# Altium PCB CTR-Upper-Main-Board-Rev-B.PcbDoc
Units mil, origin at the board's own origin, x right, y up, seen from the top; angles counter-clockwise.
Board outline 1558.99 x 1570.6 mil, 2 copper layers (Top Layer, Bottom Layer), stack 61.2 mil thick; 19 components, 8 nets, 46 pads, 15 vias.
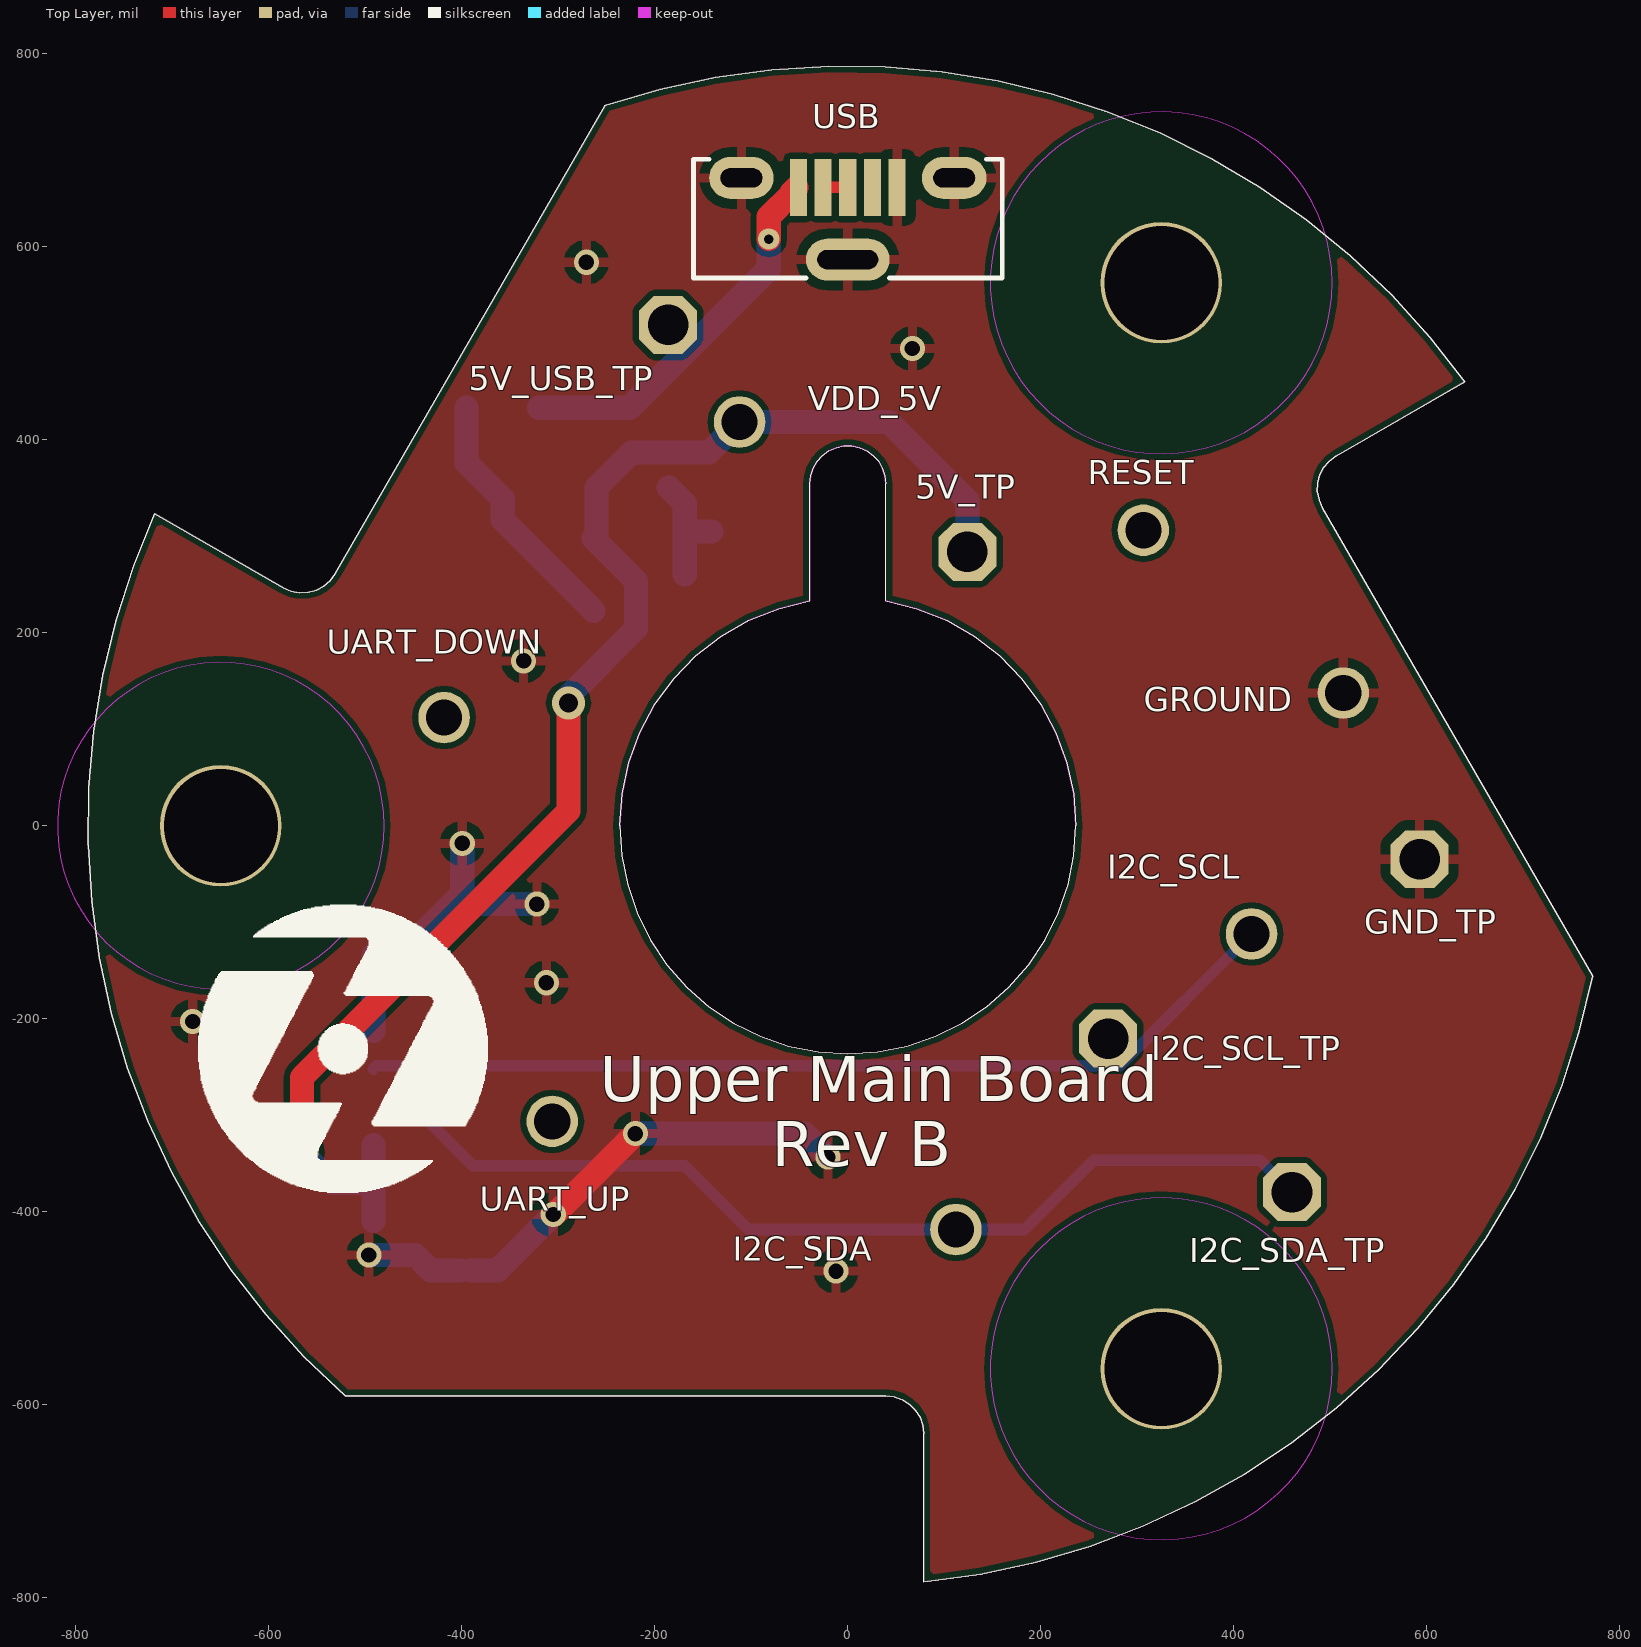
[diagram p0: Top Layer view]
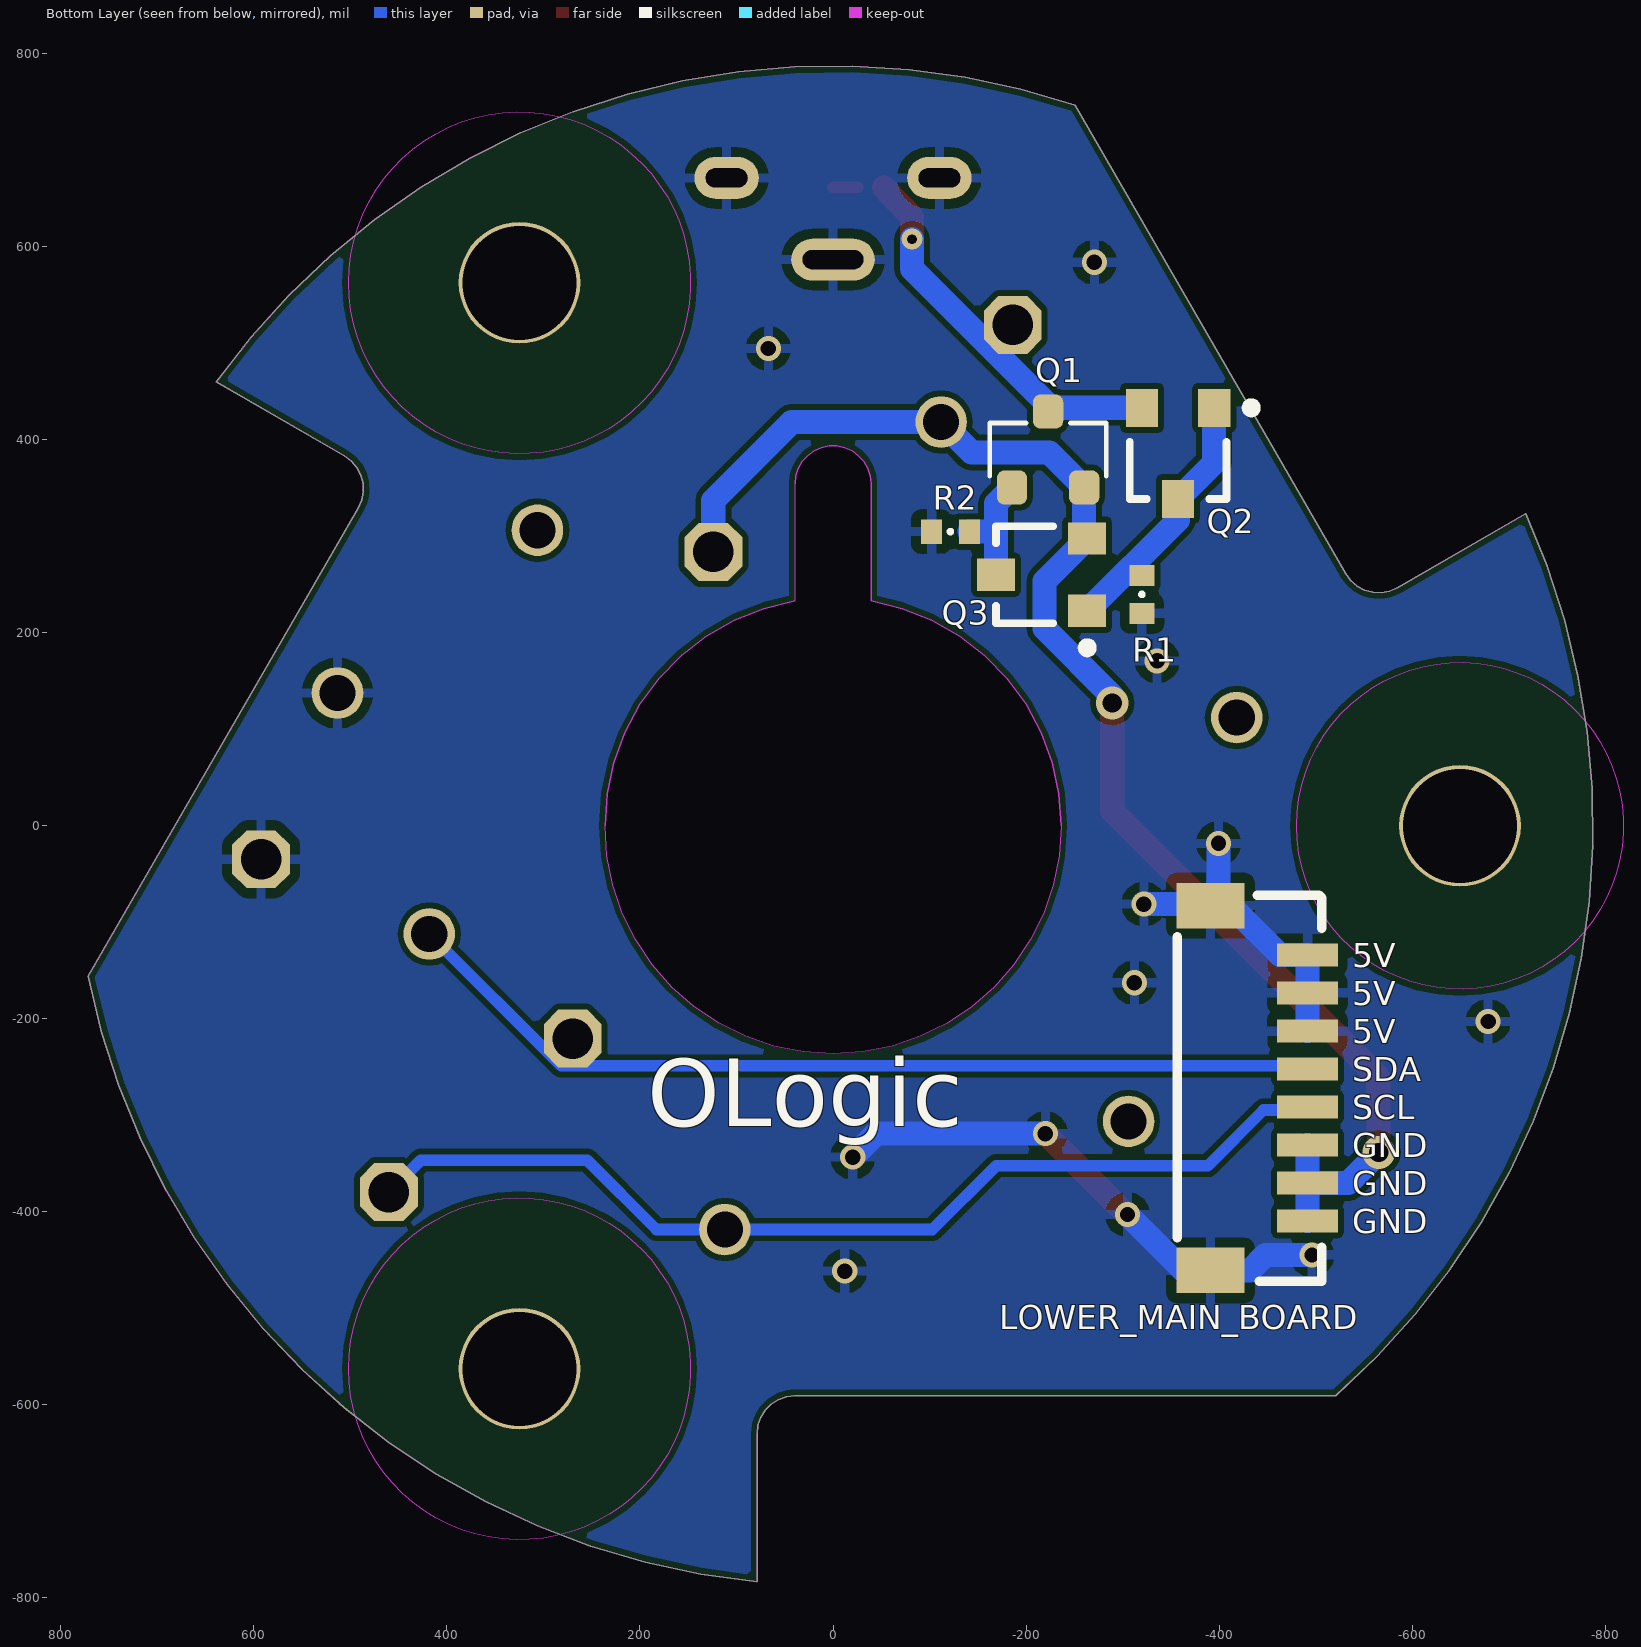
[diagram p1: Bottom Layer view, seen from below]
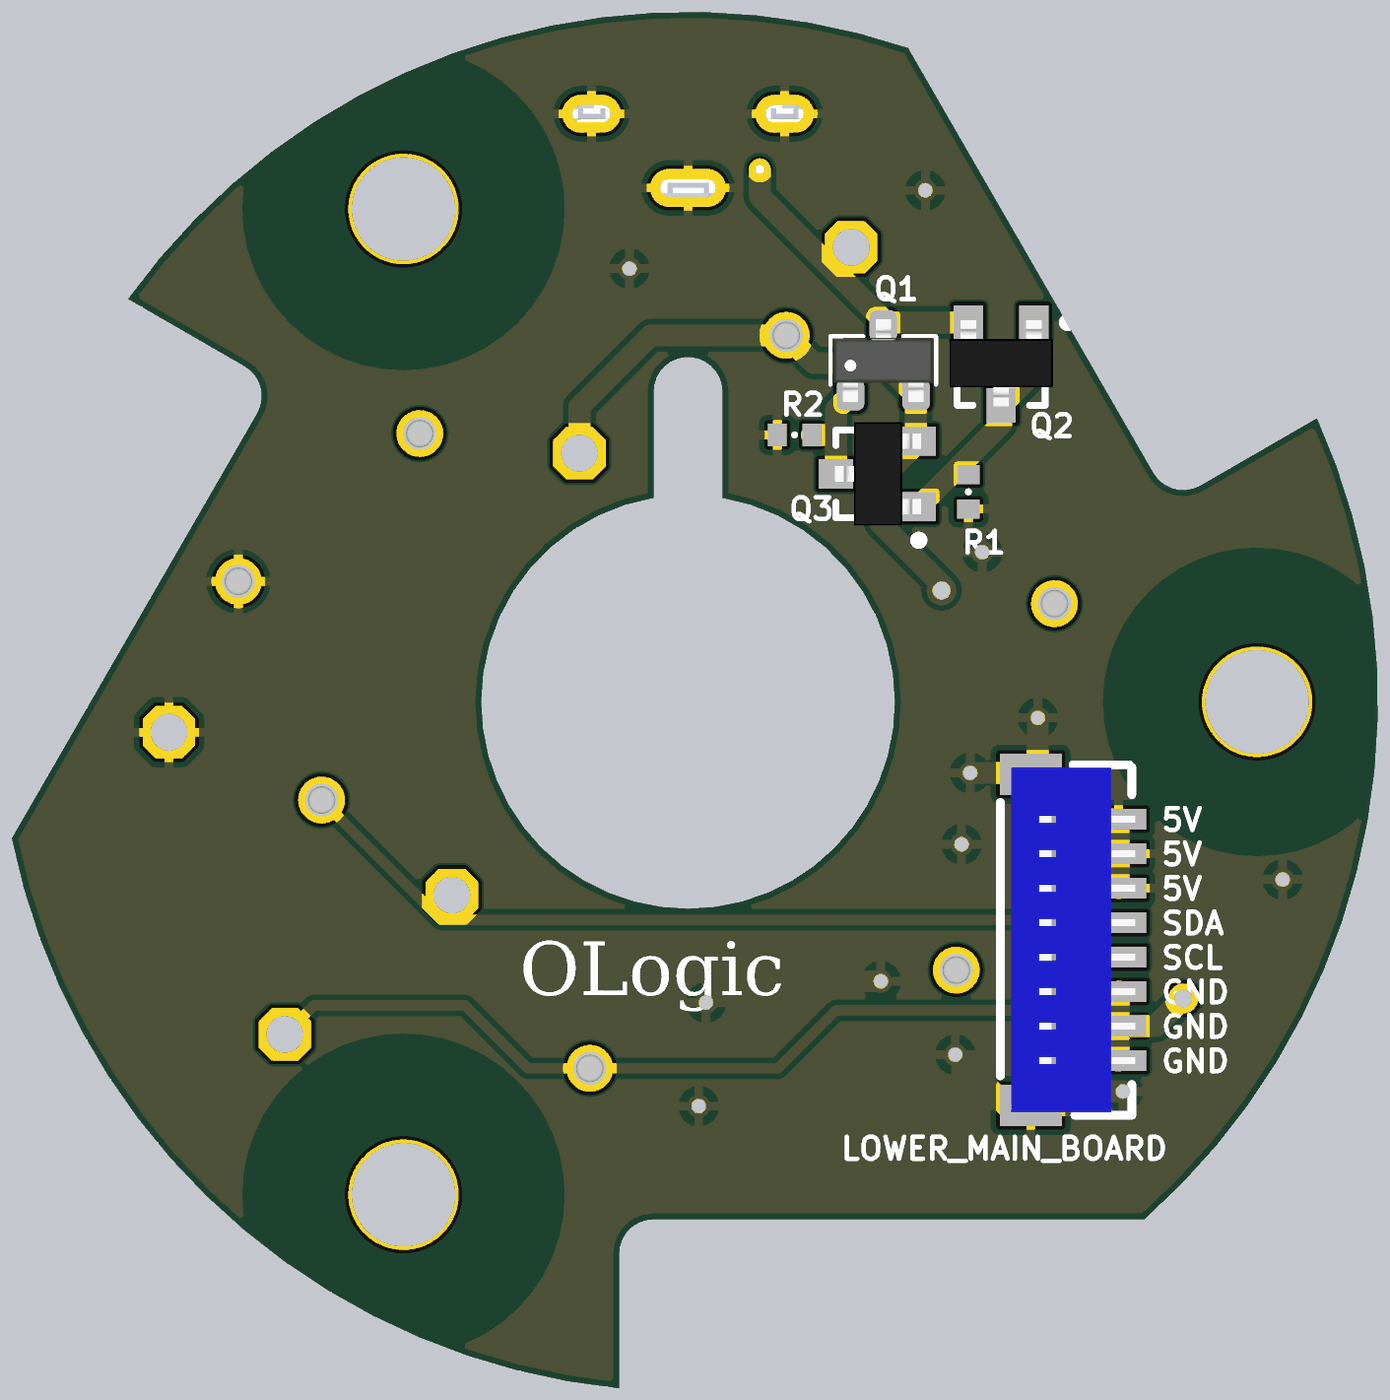
[diagram p2: 3D render of the assembled board from below, using the file's embedded part models]

## Layer stack, top to bottom
Top Solder: solder mask 0.4, Solder Resist, Dk 3.5
Top Layer: signal copper 1.8
Dielectric1: core 57.6, Dk 4.2
Bottom Layer: signal copper 1.8
Bottom Solder: solder mask 0.4, Solder Resist, Dk 3.5

## Board outline
-531.12,261.18 -251.02,746.32 -194.55,762.99 -137,775.39 -78.67,783.46 -19.91,787.15 38.96,786.44 97.62,781.33 155.73,771.85 212.97,758.05 269.02,740.02 323.57,717.85 376.3,691.66 426.93,661.61 475.18,627.86 520.77,590.6 563.44,550.03 602.97,506.39 639.12,459.92 506.16,383.15 499.06,377.92 493.31,371.23 489.19,363.44 486.91,354.92 486.58,346.11 488.22,337.45 491.75,329.37 771.84,-155.76 758.04,-213 740.01,-269.05 717.83,-323.6 691.65,-376.33 661.59,-426.96 627.84,-475.21 590.57,-520.79 550.01,-563.47 506.36,-602.99 459.89,-639.14 410.85,-671.72 359.5,-700.54 306.15,-725.45 251.09,-746.29 194.62,-762.97 137.06,-775.38 78.74,-783.45 78.74,-629.92 77.75,-621.16 74.84,-612.84 70.15,-605.37 63.92,-599.14 56.45,-594.45 48.13,-591.54 39.37,-590.55 -520.82,-590.55 -563.49,-549.98 -603.01,-506.34 -639.16,-459.86 -671.74,-410.82 -700.56,-359.47 -725.46,-306.12 -746.31,-251.06 -762.98,-194.59 -775.39,-137.03 -783.46,-78.71 -787.15,-19.94 -786.44,38.93 -781.33,97.59 -771.85,155.7 -758.06,212.94 -740.03,268.99 -717.86,323.54 -584.9,246.77 -576.82,243.24 -568.16,241.61 -559.35,241.94 -550.83,244.22 -543.03,248.34 -536.35,254.09
cut-out: -39.37,354.33 -39.37,232.92 -71.56,225.12 -102.35,212.9 -131.12,196.49 -157.31,176.22 -180.42,152.48 -199.97,125.75 -215.59,96.54 -226.98,65.43 -233.9,33.04 -236.22,0 -234.2,-30.83 -228.17,-61.14 -218.24,-90.4 -204.57,-118.11 -187.41,-143.8 -167.03,-167.03 -143.8,-187.41 -118.11,-204.57 -90.4,-218.24 -61.14,-228.17 -30.83,-234.2 0,-236.22 30.83,-234.2 61.14,-228.17 90.4,-218.24 118.11,-204.57 143.8,-187.41 167.03,-167.03 187.41,-143.8 204.57,-118.11 218.24,-90.4 228.17,-61.14 234.2,-30.83 236.22,0 233.9,33.04 226.98,65.43 215.59,96.54 199.97,125.75 180.42,152.48 157.31,176.22 131.12,196.49 102.35,212.9 71.56,225.12 39.37,232.92 39.37,354.33 38.51,362.52 35.97,370.34 31.85,377.47 26.34,383.59 19.68,388.43 12.17,391.77 4.12,393.49 -4.12,393.49 -12.17,391.77 -19.68,388.43 -26.34,383.59 -31.85,377.47 -35.97,370.34 -38.51,362.52

## Design rules (kind name [scope] priority, off if disabled: settings)
Clearance [All] p1: gap=6 ignorepadtopadclearanceinfootprint=FALSE except(0: Arc-Hole Track-Hole SMDPad-Hole THPad-Hole Via-Hole Fill-Hole Poly-Hole Region-Hole Text-Hole)
ComponentClearance ComponentClearance_BAT [InComponent('BT1') vs InComponent('CN3')] p1: gap=0 collisioncheckmode=3 verticalgap=0 showdistances=FALSE
ComponentClearance [All] p2: gap=7 collisioncheckmode=3 verticalgap=7 showdistances=FALSE
HoleSize [All] p1: absolutevalues=TRUE maxlimit=300 minlimit=10 maxpercent=80.000 minpercent=20.000
HoleToHoleClearance [All] p1: gap=7 allowstackedmicrovias=TRUE
MinimumSolderMaskSliver [InNet('VIN')] p1: minsoldermaskwidth=0.5
NetAntennae NetAntennae_ANT [InNetClass('ANT')] p1: netantennaetolerance=0
NetAntennae [All] p2: netantennaetolerance=0
PolygonConnect [All] p1: connectstyle=Relief reliefconductorwidth=10 reliefentries=4 polygonreliefangle="90 Angle" airgapwidth=10
RoutingVias [All] p1: holewidth=20 width=34 viastyle="Through Hole" minholewidth=10 minwidth=22 maxholewidth=35 maxwidth=50
SMDNeckDown [All] p1: percent=900.000
SilkToBoardRegionClearance [InNet('3.3V')] p1:
SilkToSilkClearance [All] p1: silktosilkclearance=0
SilkToSolderMaskClearance [IsPad] p1: minsilkscreentomaskgap=0 clearancetoexposedcopper=TRUE
SolderMaskExpansion [All] p1: expansion=4
Width Width_BT [InNetClass('BT')] p1: maxlimit=40 minlimit=10 preferedwidth=15
Width Width_VDD [InNet('3.3V')] p2: maxlimit=20 minlimit=7 preferedwidth=10
Width [All] p3: maxlimit=30 minlimit=6 preferedwidth=7
22 further rules are at their usual default settings.

## Classes and differential pairs
component class CTR-Upper-Main-Board-Rev-B: 5V_TP 5V_USB_TP GND_TP GROUND I2C_SCL I2C_SCL_TP I2C_SDA I2C_SDA_TP LOWER_MAIN_BOARD RESET UART_DOWN UART_UP USB VDD_5V
component class ID1: Q1 Q2 Q3 R1 R2

## Components (designator, comment, footprint, x,y, rotation, side; value= is the part's Value field where it differs from the comment)
5V_TP "Test Point" "TestPoint-TH 42 mil" 124.02,283.86 r90 top
5V_USB_TP "Test Point" "TestPoint-TH 42 mil" -186.22,518.9 r90 top
GND_TP "Test Point" "TestPoint-TH 42 mil" 592.52,-34.65 r90 top
GROUND "Pogo Pin Target Large" CTR_POGO_PIN_TARGET_LARGE 513.39,137.56 r90 top
I2C_SCL "Pogo Pin Target Large" CTR_POGO_PIN_TARGET_LARGE 418.31,-112.09 r90 top
I2C_SCL_TP "Test Point" "TestPoint-TH 42 mil" 269.68,-220.47 r90 top
I2C_SDA "Pogo Pin Target Large" CTR_POGO_PIN_TARGET_LARGE 112.09,-418.31 r90 top
I2C_SDA_TP "Test Point" "TestPoint-TH 42 mil" 460.24,-379.53 r90 top
LOWER_MAIN_BOARD "JST 1mm 0.7A" JST-BM08B-SRSS-TB -441.34,-271.65 r270 bottom
Q1 "DMG2305UX" DMG2305UX-7 -222.83,389.76 r180 bottom
Q2 "MMBT2907A" SOT23 -357.48,385.83 r0 bottom
Q3 "MMBT2907A" SOT23 -216.14,260.24 r90 bottom
R1 "47K" RESC0402(1005)_N -320.08,239.76 r90 bottom
R2 "54.9K" RESC0402(1005)_N -121.65,304.72 r180 bottom
RESET "Pogo Pin Target Large" CTR_POGO_PIN_TARGET_LARGE 306.22,306.22 r90 top
UART_DOWN "Pogo Pin Target Large" CTR_POGO_PIN_TARGET_LARGE -418.31,112.09 r90 top
UART_UP "Pogo Pin Target Large" CTR_POGO_PIN_TARGET_LARGE -306.22,-306.22 r90 top
USB "USB-uB-V" MOLEX_105133-0011 0,629.92 r0 top
VDD_5V "Pogo Pin Target Large" CTR_POGO_PIN_TARGET_LARGE -112.09,418.31 r90 top

## Footprints (in the part's own frame and the unit in brackets; to place one, negate y for a bottom-side part, rotate by r counter-clockwise, add the part's x,y. Pads: shape width x height; smd on the part's side, far side on the other; paste and mask are expansions set on the pad)
CTR_POGO_PIN_TARGET_LARGE [mm] "Through-hole pogo pin target, large"
  round 1.356 hole 0.95: 1(0,0)
  body extent -1.1,-1.1 1.11,1.11, height 6.75
DMG2305UX-7 [mm] "SOT95P240X110-3L30 - Small Outline Transistor (SOT23), 0.95 mm pitch; 3 pin, 2.90 mm L X 1.30 mm W X 1.10 mm H body"
  rrect50% 0.8x0.9 smd: D(0,1) G(-0.95,-1) S(0.95,-1)
  silkscreen extent -1.53,-0.7 1.53,0.7, body extent -1.45,-1.2 1.45,1.2, height 1.1
JST-BM08B-SRSS-TB [mm] "JST 1mm x 8 SMT Vertical Connector"
  rect 1.2x1.8 smd: 0(-4.8,-1.275) 0(4.8,-1.275)
  rect 0.6x1.6 smd: 1(-3.5,1.275) 2(-2.5,1.275) 3(-1.5,1.275) 4(-0.5,1.275) 5(0.5,1.275) 6(1.5,1.275) 7(2.5,1.275) 8(3.5,1.275)
  silkscreen extent -5.07,-2.15 5.09,1.66, body extent -5,-1.84 5,1.76, height 4.32
MOLEX_105133-0011 [mm] "Connector, USB Receptacle Right Angle; 8 pin, 8.00 mm L X 3.00 mm W X 6.70 mm H body"
  rrect100% 1.7x1.1 hole 0.5 slot 1.1 at 0 deg paste-1.7: 0(-2.8,1.05) 0(2.8,1.05)
  rrect100% 2.2x1.1 hole 0.5 slot 1.6 at 0 deg paste-2.2: 0(0,-1.1)
  rect 0.45x1.5 smd: 1(-1.3,0.8) 2(-0.65,0.8) 3(0,0.8) 4(0.65,0.8) 5(1.3,0.8)
  silkscreen extent -4.06,-1.58 4.06,1.54, body extent -4.03,-1.58 3.97,1.43, height 6.71
RESC0402(1005)_N [mm] "Chip Resistor, Body 1.0x0.5mm, IPC Medium Density"
  rect 0.55x0.65 smd: 1(-0.5,0) 2(0.5,0)
  silkscreen extent -0.05,-0.05 0.05,0.05, body extent -0.52,-0.27 0.53,0.28, height 0.4
SOT23 [mm] "SOT-23; 3 Leads; Body 3.0 x 2.5 mm, inc. leads (LxW max)"
  rect 0.85x1 smd: 1(-0.95,-1.2) 2(0.95,-1.2) 3(0,1.2)
  silkscreen extent -2.05,-1.32 1.28,1.2, body extent -1.5,-1.27 1.5,1.23, height 1.1
"TestPoint-TH 42 mil" [mil] "Test Point - Thru-Hole 42 mil"
  oct 60x60 hole 42: 1(0,0)

## Part data
5V_TP 5V_USB_TP GND_TP I2C_SCL_TP I2C_SDA_TP: library part "TestPoint, small"
GROUND I2C_SCL I2C_SDA RESET UART_DOWN UART_UP VDD_5V: library part "CTR Pogo Pin Target Large", "CTR Pogo Pin Target Large", Manufacturer 1=CTR, Manufacturer Part Number 1="Large Target", Category="Connectors, Interconnects", Material="Copper Alloy", Mounting Type="Through Hole", Part Status=Active, Plating=Gold, Supplier 1=CTR, Supplier Part Number 1="Large Target", Supplier Stock 1=9999999, Supplier Unit Price 1=0.15
LOWER_MAIN_BOARD: library part JST-BM08B-SRSS-TB(LF)(SN), "1mm Locking Header, 8-Pin", Manufacturer="Japan Solderless Terminals (JST)", Manufacturer Part Number=BM08B-SRSS-TB(LF)(SN), Supplier Part Number 1=455-1794-1-ND, ComponentLink1Description=https://datasheet.ciiva.com/730/esr-730608.pdf, ComponentLink1URL=https://datasheet.ciiva.com/730/esr-730608.pdf, ComponentLink2Description=https://datasheet.ciiva.com/26894/getdatasheetpartid-640965-26894529.pdf, ComponentLink2URL=https://datasheet.ciiva.com/26894/getdatasheetpartid-640965-26894529.pdf, ComponentLink3Description=https://datasheet.ciiva.com/712/esr-712616.pdf, ComponentLink3URL=https://datasheet.ciiva.com/712/esr-712616.pdf, ComponentLink4Description=https://datasheet.ciiva.com/712/esr-712617.pdf, ComponentLink4URL=https://datasheet.ciiva.com/712/esr-712617.pdf, ComponentLink5Description=https://datasheet.ciiva.com/8052/91630-8052091.pdf, ComponentLink5URL=https://datasheet.ciiva.com/8052/91630-8052091.pdf, ComponentLink6Description=https://datasheet.ciiva.com/16380/esr-16380526.pdf, ComponentLink6URL=https://datasheet.ciiva.com/16380/esr-16380526.pdf, No of Positions=8, Pitch="1 mm", Pricing 1="1=0.93, 10=0.814, 100=0.7024, 500=0.5747 (USD)", Stock 1=18919, Style/Orientation="Vertical Header/Plug", Supplier 1=Digikey, Termination=Solder, Type="Shrouded Header"
Q1: "MOSFET P-CH 20V 4.2A SOT23", Current - Continuous Drain (Id) @ 25°C="4.2A (Ta)", Drain to Source Voltage (Vdss)=20V, Input Capacitance (Ciss) @ Vds="808pF @ 15V", Manufacturer="Diodes Incorporated", Manufacturer Part Number=DMG2305UX-7, Operating Temperature="-55°C ~ 150°C (TJ)", Package / Case="TO-236-3, SC-59, SOT-23-3", Power - Max=1.4W, Supplier Device Package=SOT-23, Supplier Part Number 1=DMG2305UX-7DICT-ND, Category="Discrete Semiconductor Products", ComponentLink1Description=http://www.diodes.com/_files/datasheets/DMG2305UX.pdf, ComponentLink1URL=http://www.diodes.com/_files/datasheets/DMG2305UX.pdf, Creator=osman, FET Feature=Standard, FET Type="MOSFET P-Channel, Metal Oxide", Gate Charge (Qg) @ Vgs="10.2nC @ 4.5V", Mounting Type="Surface Mount", Packaging="Cut Tape (CT)", Pricing 1="1=0.38, 10=0.311, 100=0.1649, 500=0.10846, 1000=0.0739 (USD)", Rds On (Max) @ Id, Vgs="52 mOhm @ 4.2A, 4.5V", RoHS="RoHS Compliant", Stock 1=78669, Supplier 1=Digi-Key, Vgs(th) (Max) @ Id="900mV @ 250µA"
Q2 Q3: "PNP General Purpose Amplifier", Current - Collector (Ic) (Max)=800mA, Current - Collector Cutoff (Max)=-, DC Current Gain (hFE) (Min) @ Ic, Vce="100 @ 150mA, 10V", Frequency - Transition=200MHz, Manufacturer="Fairchild Semiconductor", Package / Case="TO-236-3, SC-59, SOT-23-3", Power - Max=350mW, Supplier Device Package=SOT-23, Supplier Part Number 1=MMBT2907AFSCT-ND, Voltage - Collector Emitter Breakdown (Max)=60V, Category="Discrete Semiconductor Products", ComponentLink1Description=http://www.fairchildsemi.com/ds/MM/MMBT2907A.pdf, ComponentLink1URL=http://www.fairchildsemi.com/ds/MM/MMBT2907A.pdf, Manufacturer Part Number=MMBT2907A, Mounting Type="Surface Mount", MPN=MMBT2907A, Packaging="Cut Tape (CT)", PN=MMBT2907AFSCT-ND, Pricing 1="1=0.2, 10=0.187, 25=0.17, 100=0.1224, 250=0.07208, 500=0.0598, 1000=0.04079 (USD)", RoHS="RoHS Compliant", Stock 1=74892, Supplier 1=Digi-Key, Transistor Type=PNP, Vce Saturation (Max) @ Ib, Ic="1.6V @ 50mA, 500mA", Vendor=Digikey
R1: library part "RES 47K OHM 5% 1/10W 0402", "47K 0402", Manufacturer="Panasonic Electronic Components", Manufacturer Part Number=ERJ-2GEJ473X, Operating Temperature="-55°C ~ 155°C", Package / Case="0402 (1005 Metric)", Power (Watts)="0.1W, 1/10W", Resistance (Ohms)=47k, Supplier Device Package=0402, Supplier Part Number 1=P47KJCT-ND, Temperature Coefficient=±200ppm/°C, Tolerance=±5%, Category=Resistors, ComponentLink1Description=http://industrial.panasonic.com/www-cgi/jvcr13pz.cgi?E+PZ+3+AOA0001+ERJ2GEJ473X+7+WW, ComponentLink1URL=http://industrial.panasonic.com/www-cgi/jvcr13pz.cgi?E+PZ+3+AOA0001+ERJ2GEJ473X+7+WW, Composition="Thick Film", Features="Automotive AEC-Q200", Height="0.016\" (0.40mm)", Number of Terminations=2, Packaging="Cut Tape (CT)", Pricing 1="1=0.1, 50=0.0106, 100=0.0078, 250=0.00596, 500=0.00476, 1000=0.0035, 5000=0.00251 (USD)", RoHS="RoHS Compliant", Size / Dimension="0.039\" L x 0.020\" W (1.00mm x 0.50mm)", Stock 1=1670564, Supplier 1=Digi-Key
R2: library part "RES 54.9K OHM 1% 1/10W 0402", "54.9K 1% 0402", Manufacturer="Panasonic Electronic Components", Manufacturer Part Number=ERJ-2RKF5492X, Operating Temperature="-55°C ~ 155°C", Package / Case="0402 (1005 Metric)", Power (Watts)="0.1W, 1/10W", Resistance (Ohms)=54.9k, Supplier Device Package=0402, Supplier Part Number 1=P54.9KLCT-ND, Temperature Coefficient=±100ppm/°C, Tolerance=±1%, Category=Resistors, ComponentLink1Description=http://industrial.panasonic.com/www-cgi/jvcr13pz.cgi?E+PZ+3+AOA0002+ERJ2RKF5492X+7+WW, ComponentLink1URL=http://industrial.panasonic.com/www-cgi/jvcr13pz.cgi?E+PZ+3+AOA0002+ERJ2RKF5492X+7+WW, Composition="Thick Film", Failure Rate=-, Features="Automotive AEC-Q200", Height - Seated (Max)="0.016\" (0.40mm)", Number of Terminations=2, Packaging="Cut Tape (CT)", Part Status=Active, Pricing 1="1=0.1, 50=0.015, 100=0.011, 250=0.0084, 500=0.00674, 1000=0.00496, 5000=0.00355 (USD)", RoHS="RoHS Compliant", Size / Dimension="0.039\" L x 0.020\" W (1.00mm x 0.50mm)", Stock 1=151111, Supplier 1=Digi-Key
USB: library part USB-MicroB-V, "USB, Micro-B, Vertical", Current Rating="1A, 1.8A", Insulation Color=Black, Manufacturer="Molex, LLC", Manufacturer Part Number=1051330001, Material Flammability Rating="UL94 V-0", Operating Temperature="-35°C ~ 85°C", Supplier Part Number 1=WM9734CT-ND, Voltage - Rated=30VAC, Category="Connectors, Interconnects", ComponentLink1Description=http://www.molex.com/pdm_docs/sd/1051330001_sd.pdf, ComponentLink1URL=http://www.molex.com/pdm_docs/sd/1051330001_sd.pdf, Connector Type="USB - micro B", Contact Finish=Gold, Features="Pick and Place", Gender=Receptacle, Ingress Protection=-, Mating Cycles=10000, Mounting Feature=Vertical, Mounting Type="Surface Mount", Number of Contacts=5, Number of Ports=1, Packaging="Cut Tape (CT)", Part Status=Active, Pricing 1="1=1.06, 10=0.928, 25=0.8732, 50=0.837, 100=0.8005, 250=0.72776 (USD)", RoHS="RoHS Compliant", Shell/Shielding Material="Steel, Stainless", Shielding=Shielded, Specifications="USB 2.0", Stock 1=35948, Supplier 1=Digi-Key, Termination=Solder

## Free pads (board coordinates)
  round 125.98 hole 118.11: 1(-649.61,0) 1(324.8,-562.58) 1(324.8,562.58)

## Via types
v1: diameter 26, hole 16, Top Layer to Bottom Layer, tented both sides, 12 vias
v2: diameter 22, hole 10, Top Layer to Bottom Layer, 1 vias
v3: diameter 34, hole 20, Top Layer to Bottom Layer, 1 vias
v4: diameter 34, hole 20, Top Layer to Bottom Layer, tented both sides, 1 vias

## Nets (pads, with @x,y where several pads share a name; then routed paths per layer and width w, separated by ;. In a path a pad name is that pad's centre, name@x,y a point inside that pad or via, vN(x,y) a via of type N, cw(c..) or ccw(c..) an arc to the next point about the centre after c; other vN are vias at no path point)
5V: 5V_TP.1 LOWER_MAIN_BOARD.6 LOWER_MAIN_BOARD.7 LOWER_MAIN_BOARD.8 Q1.S Q3.2 VDD_5V.1 | length 1538.6
  Top Layer w12: 5V_TP.1 133.07,283.86 5V_TP.1@124.02,292.91
  Top Layer w25: v3(-565.35,-338.58) -565.35,-260.63 -289.37,15.35 v4(-289.37,127.17)
  Bottom Layer w25: v3(-565.35,-338.58) -533.86,-370.08 LOWER_MAIN_BOARD.7 ; LOWER_MAIN_BOARD.8 LOWER_MAIN_BOARD.7 ; LOWER_MAIN_BOARD.6 LOWER_MAIN_BOARD.7 ; v4(-289.37,127.17) -289.37,134.27 -219.29,204.35 -219.29,253.54 Q3.2 -260.24,300.79 Q1.S -224.02,386.61 -143.78,386.61 VDD_5V.1 42.72,418.31 124.02,337.01 5V_TP.1
5V_USB: 5V_USB_TP.1 Q1.D Q2.2 USB.1 | length 394.1
  Top Layer w25: v2(-81.89,607.87) -81.89,631.01 -58.27,654.63 -58.27,656.09 USB.1@-52.95,661.42
  Bottom Layer w25: Q2.2 -225.98,433.07 -81.89,577.17 v2(-81.89,607.87)
GND: GND_TP.1 GROUND.1 LOWER_MAIN_BOARD.0 LOWER_MAIN_BOARD.1 LOWER_MAIN_BOARD.2 LOWER_MAIN_BOARD.3 R1.1 R2.1 USB.0 USB.5 | length 866.8
  Top Layer w25: v1(-305.12,-402.76) -303.94,-402.76 v1(-220.08,-318.9)
  Bottom Layer w25: v1(-496.26,-444.68) -447.93,-444.68 -431.99,-460.63 LOWER_MAIN_BOARD.0@-401.97,-460.63 ; LOWER_MAIN_BOARD.3 LOWER_MAIN_BOARD.2 LOWER_MAIN_BOARD.1 -463.19,-133.86 -399.41,-70.08 v1(-399.41,-18.31) ; LOWER_MAIN_BOARD.0@-399.41,-81.1 v1(-322.05,-81.1) ; LOWER_MAIN_BOARD.0@-391.14,-460.63 -362.99,-460.63 v1(-305.12,-402.76) ; v1(-220.08,-318.9) -44.88,-318.9 v1(-20.47,-343.31)
  other v1: -12.2,-461.42 -678.74,-202.76 -312.2,-162.6 -335.83,170.87 66.93,494.49 -270.87,583.86
I2C_SCL: I2C_SCL.1 I2C_SCL_TP.1 LOWER_MAIN_BOARD.4 | length 967.8
  Bottom Layer w12: LOWER_MAIN_BOARD.4 -488.32,-248.75 281.64,-248.75 I2C_SCL.1
I2C_SDA: I2C_SDA.1 I2C_SDA_TP.1 LOWER_MAIN_BOARD.5 | length 1027.4
  Bottom Layer w12: LOWER_MAIN_BOARD.5@-472.44,-294.49 -446.06,-294.49 -388.47,-352.08 -169.18,-352.08 -102.95,-418.31 I2C_SDA.1 182.87,-418.31 254.72,-346.46 427.17,-346.46 I2C_SDA_TP.1
NetQ1_G: Q1.G Q3.3 R2.2 | length 125.1
  Bottom Layer w25: Q1.G -168.9,333.86 -168.9,305.91 ; Q3.3 -168.9,305.91 ; R2.2 -167.72,304.72 -168.9,305.91
NetQ2_1: Q2.1 Q2.3 Q3.1 R1.2 | length 264.7
  Bottom Layer w25: Q2.1 -394.88,375.98 Q2.3 -357.48,316.93 Q3.1
NetUSB_2: USB.2 USB.3 | length 25.6
  Top Layer w12: USB.2 USB.3
pads on no net: RESET.1 UART_DOWN.1 UART_UP.1 USB.4

## Polygon pours and split planes (outlines as drawn)
GND on Bottom Layer "GND_L02_P000" (solid, remove dead copper, pour order 0): -883.86,822.83 -868.9,807.87 785.43,807.87 785.43,10.63 892.91,-96.85 871.65,-118.11 871.65,-938.98 -926.77,-938.98 -935.43,-930.31
GND on Top Layer "GND_L01_P002" (solid, remove dead copper, pour order 2): -991.34,893.7 -970.08,872.44 824.02,872.44 824.02,-738.98 692.91,-870.08 684.25,-861.42 -1066.54,-861.42

## Keep-outs
Keep-Out Layer:
  circle w1: c324.8,562.58 r177.17
  circle w1: c324.8,-562.58 r177.17
  circle w1: c-649.61,0 r169.29
  lines w1: -787.15,-19.94 -786.44,38.93 -781.33,97.59 -771.85,155.7 -758.06,212.94 -740.03,268.99 -717.86,323.54 -584.9,246.77 -576.82,243.24 -568.16,241.61 -559.35,241.94 -550.83,244.22 -543.03,248.34 -536.35,254.09 -531.12,261.18 -251.02,746.32 -194.55,762.99 -137,775.39 -78.67,783.46 -19.91,787.15 38.96,786.44 97.62,781.33 155.73,771.85 212.97,758.05 269.02,740.02 323.57,717.85 376.3,691.66 426.93,661.61 475.18,627.86 520.77,590.6 563.44,550.03 602.97,506.39 639.12,459.92 506.16,383.15 499.06,377.92 493.31,371.23 489.19,363.44 486.91,354.92 486.58,346.11 488.22,337.45 491.75,329.37 771.84,-155.76 758.04,-213 740.01,-269.05 717.83,-323.6 691.65,-376.33 661.59,-426.96 627.84,-475.21 590.57,-520.79 550.01,-563.47 506.36,-602.99 459.89,-639.14 410.85,-671.72 359.5,-700.54 306.15,-725.45 251.09,-746.29 194.62,-762.97 137.06,-775.38 78.74,-783.45 78.74,-629.92 77.75,-621.16 74.84,-612.84 70.15,-605.37 63.92,-599.14 56.45,-594.45 48.13,-591.54 39.37,-590.55 -520.82,-590.55 -563.49,-549.98 -603.01,-506.34 -639.16,-459.86 -671.74,-410.82 -700.56,-359.47 -725.46,-306.12 -746.31,-251.06 -762.98,-194.59 -775.39,-137.03 -783.46,-78.71 -787.15,-19.94 ; -236.22,0 -234.2,-30.83 -228.17,-61.14 -218.24,-90.4 -204.57,-118.11 -187.41,-143.8 -167.03,-167.03 -143.8,-187.41 -118.11,-204.57 -90.4,-218.24 -61.14,-228.17 -30.83,-234.2 0,-236.22 30.83,-234.2 61.14,-228.17 90.4,-218.24 118.11,-204.57 143.8,-187.41 167.03,-167.03 187.41,-143.8 204.57,-118.11 218.24,-90.4 228.17,-61.14 234.2,-30.83 236.22,0 233.9,33.04 226.98,65.43 215.59,96.54 199.97,125.75 180.42,152.48 157.31,176.22 131.12,196.49 102.35,212.9 71.56,225.12 39.37,232.92 39.37,354.33 38.51,362.52 35.97,370.34 31.85,377.47 26.34,383.59 19.68,388.43 12.17,391.77 4.12,393.49 -4.12,393.49 -12.17,391.77 -19.68,388.43 -26.34,383.59 -31.85,377.47 -35.97,370.34 -38.51,362.52 -39.37,354.33 -39.37,232.92 -71.56,225.12 -102.35,212.9 -131.12,196.49 -157.31,176.22 -180.42,152.48 -199.97,125.75 -215.59,96.54 -226.98,65.43 -233.9,33.04 -236.22,0

## Silkscreen, mask and mechanical layers (free items; w line width, h text height)
Top Overlay:
  drawing of 652 lines, arcs and shapes, not listed
  text "Upper Main Board" at -257.09,-300.79 h80
  text "Rev B" at -78.74,-368.5 h80
Bottom Overlay:
  text "5V" at -537.8,-146.35 h25
  text "5V" at -537.8,-185.72 h25
  text "5V" at -537.8,-225.09 h25
  text "SDA" at -537.8,-264.46 h25
  text "SCL" at -537.8,-303.83 h25
  text "OLogic" at 192.52,-334.65 h120
  text "GND" at -537.8,-343.2 h25
  text "GND" at -537.8,-382.57 h25
  text "GND" at -537.8,-421.94 h25
Mechanical 1:
  lines w1: -787.15,-19.94 -786.44,38.93 -781.33,97.59 -771.85,155.7 -758.06,212.94 -740.03,268.99 -717.86,323.54 -584.9,246.77 -576.82,243.24 -568.16,241.61 -559.35,241.94 -550.83,244.22 -543.03,248.34 -536.35,254.09 -531.12,261.18 -251.02,746.32 -194.55,762.99 -137,775.39 -78.67,783.46 -19.91,787.15 38.96,786.44 97.62,781.33 155.73,771.85 212.97,758.05 269.02,740.02 323.57,717.85 376.3,691.66 426.93,661.61 475.18,627.86 520.77,590.6 563.44,550.03 602.97,506.39 639.12,459.92 506.16,383.15 499.06,377.92 493.31,371.23 489.19,363.44 486.91,354.92 486.58,346.11 488.22,337.45 491.75,329.37 771.84,-155.76 758.04,-213 740.01,-269.05 717.83,-323.6 691.65,-376.33 661.59,-426.96 627.84,-475.21 590.57,-520.79 550.01,-563.47 506.36,-602.99 459.89,-639.14 410.85,-671.72 359.5,-700.54 306.15,-725.45 251.09,-746.29 194.62,-762.97 137.06,-775.38 78.74,-783.45 78.74,-629.92 77.75,-621.16 74.84,-612.84 70.15,-605.37 63.92,-599.14 56.45,-594.45 48.13,-591.54 39.37,-590.55 -520.82,-590.55 -563.49,-549.98 -603.01,-506.34 -639.16,-459.86 -671.74,-410.82 -700.56,-359.47 -725.46,-306.12 -746.31,-251.06 -762.98,-194.59 -775.39,-137.03 -783.46,-78.71 -787.15,-19.94 ; -236.22,0 -234.2,-30.83 -228.17,-61.14 -218.24,-90.4 -204.57,-118.11 -187.41,-143.8 -167.03,-167.03 -143.8,-187.41 -118.11,-204.57 -90.4,-218.24 -61.14,-228.17 -30.83,-234.2 0,-236.22 30.83,-234.2 61.14,-228.17 90.4,-218.24 118.11,-204.57 143.8,-187.41 167.03,-167.03 187.41,-143.8 204.57,-118.11 218.24,-90.4 228.17,-61.14 234.2,-30.83 236.22,0 233.9,33.04 226.98,65.43 215.59,96.54 199.97,125.75 180.42,152.48 157.31,176.22 131.12,196.49 102.35,212.9 71.56,225.12 39.37,232.92 39.37,354.33 38.51,362.52 35.97,370.34 31.85,377.47 26.34,383.59 19.68,388.43 12.17,391.77 4.12,393.49 -4.12,393.49 -12.17,391.77 -19.68,388.43 -26.34,383.59 -31.85,377.47 -35.97,370.34 -38.51,362.52 -39.37,354.33 -39.37,232.92 -71.56,225.12 -102.35,212.9 -131.12,196.49 -157.31,176.22 -180.42,152.48 -199.97,125.75 -215.59,96.54 -226.98,65.43 -233.9,33.04 -236.22,0